# Altium PCB BMS_slave.PcbDoc (part 2 of 5)
Units mm, origin at the board's own origin, x right, y up, seen from the top; angles counter-clockwise.
Board outline 124.71 x 100.58 mm, 4 copper layers (Layer 1 - Top Layer, Layer 2 - GND, Layer 3 - Signal, Layer 4 - Bottom Layer), stack 1.56 mm thick; 370 components, 202 nets, 969 pads, 371 vias.
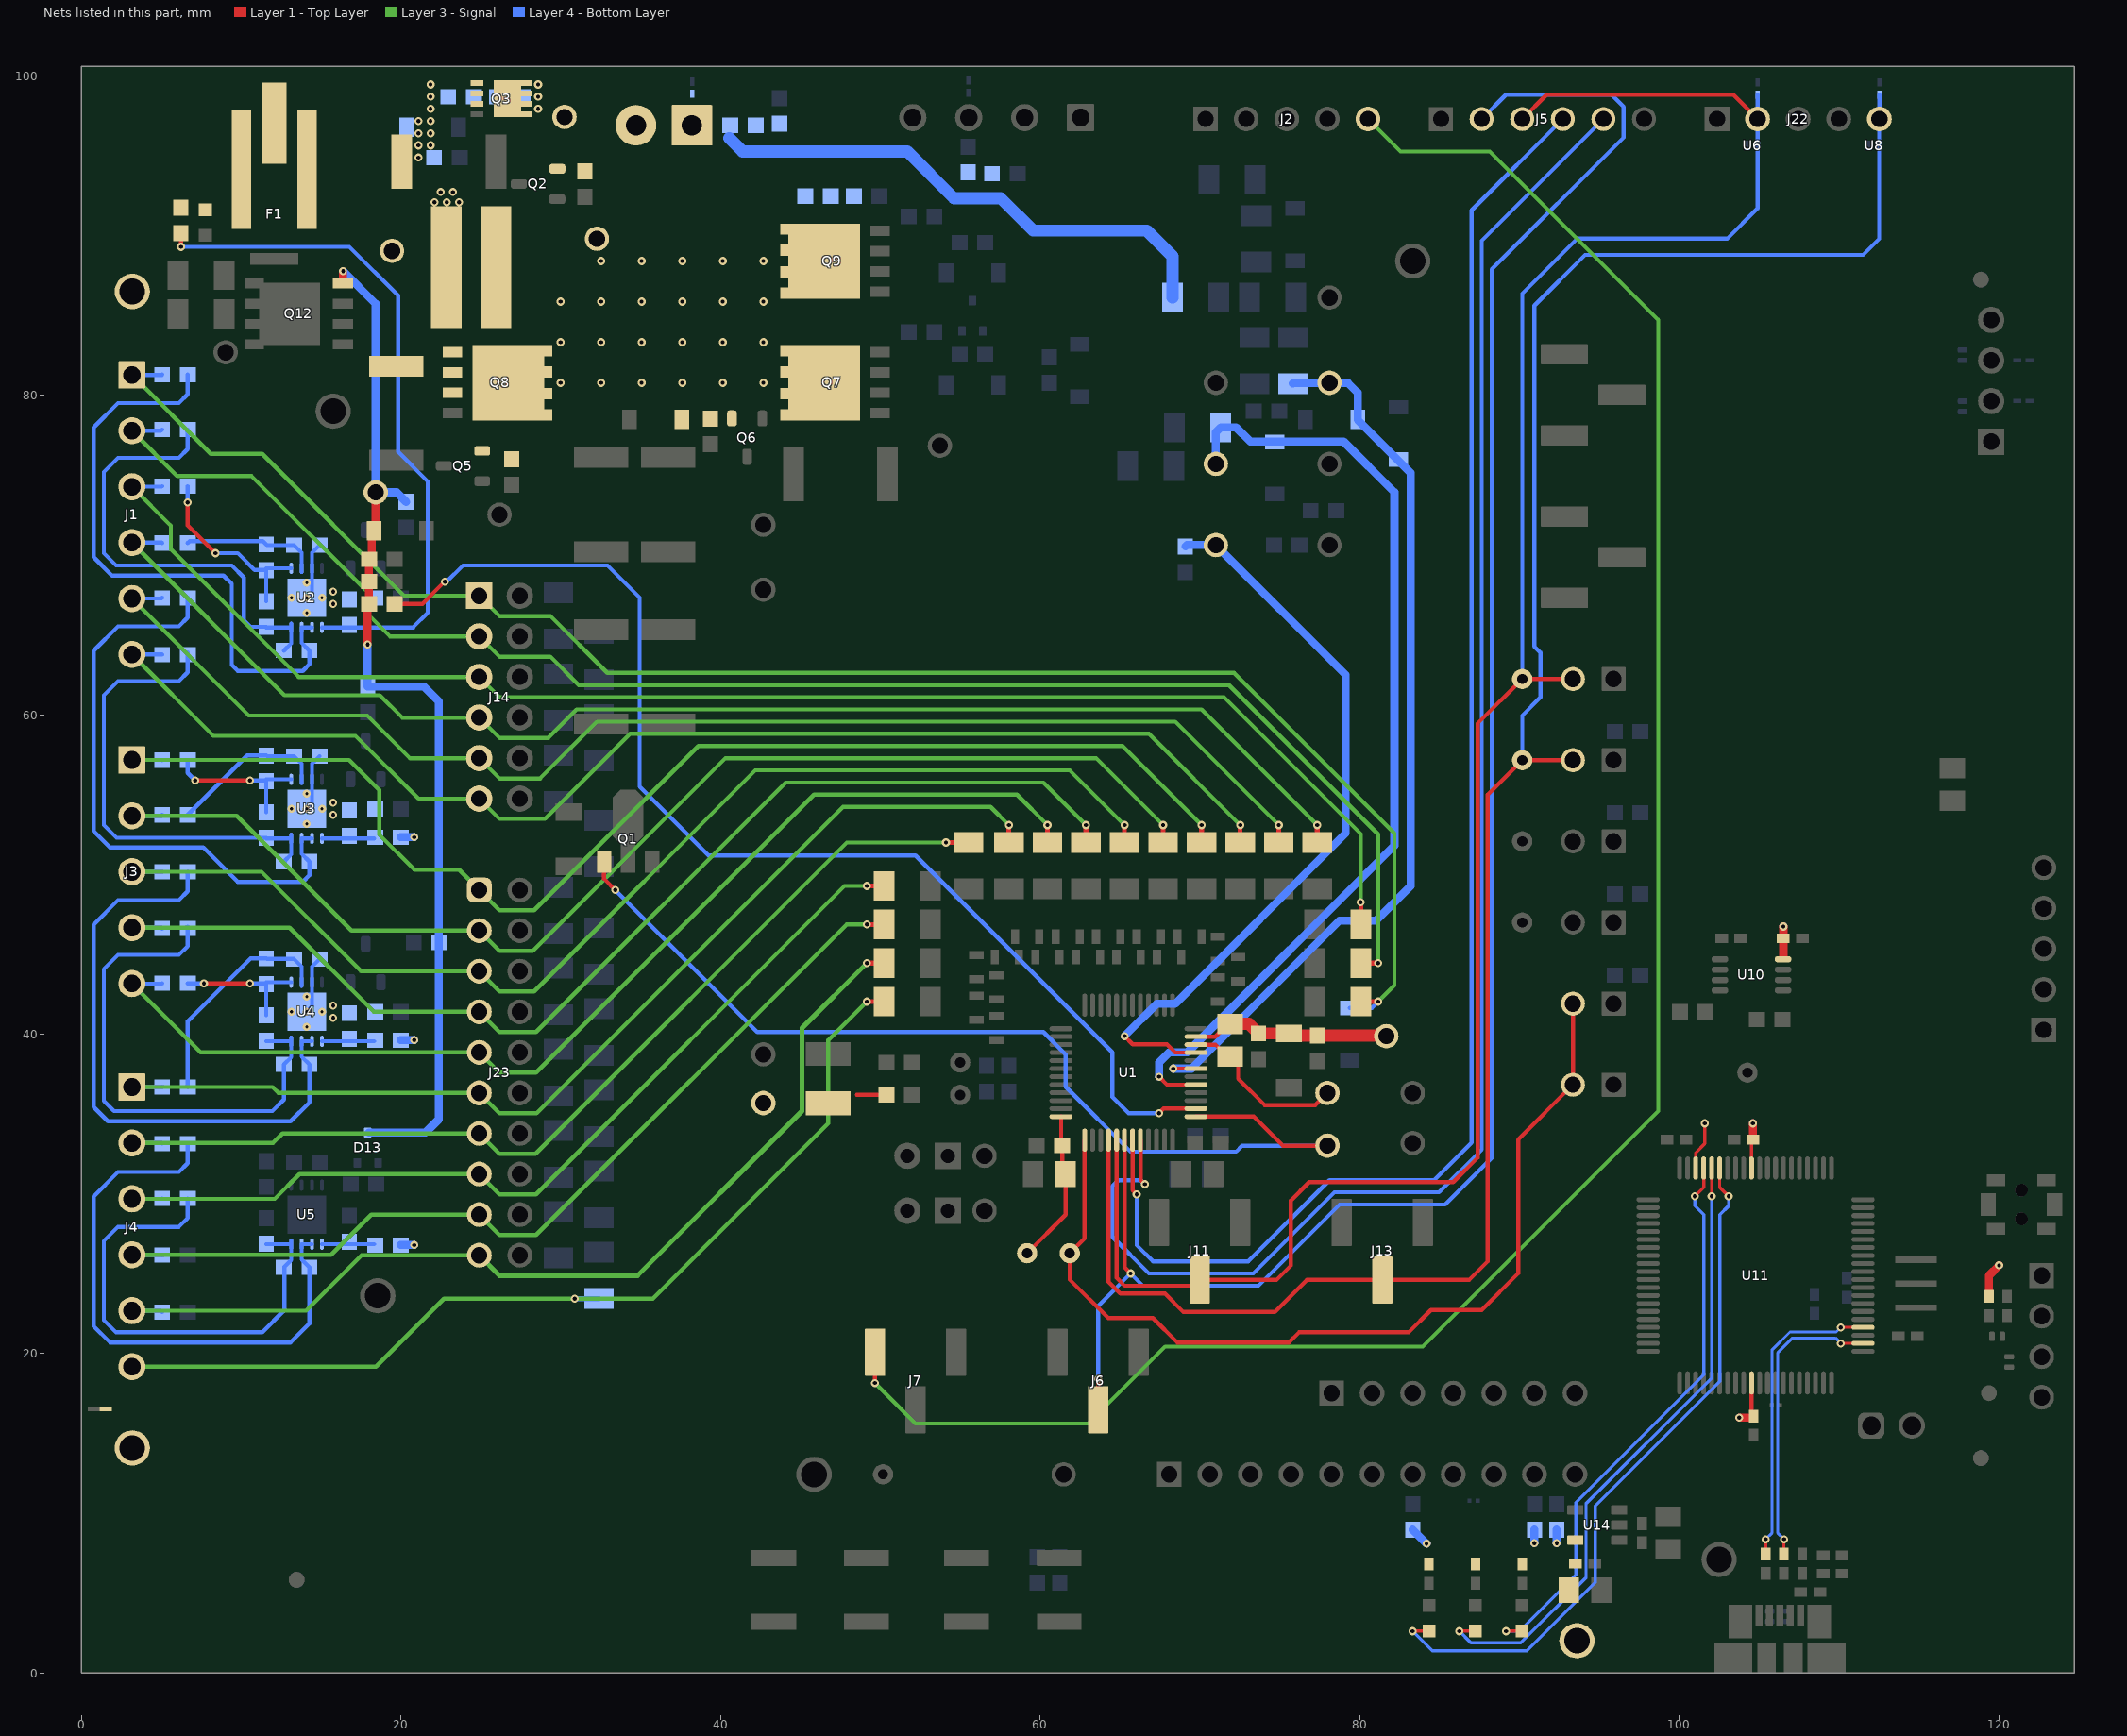
[diagram p4: the nets of this part, all layers, seen from the top]

## Part data
C1 C71: library part CMP-0008710-2, "CAP, CERM, 1 uF, 100 V, +/- 10%, X7R, 1206", Cap_Case=1206_180, Manufacturer=TDK, Supplier Part Number 1=445-4467-1-ND, TempCo=X7R, Tolerance_%=10%, Value1="0.004575 ohm", Value2=100V, ValueDisplayed=1uF, AEC Category=Q200, AEC Grade=N/A, AEC Qualified=N, Cap_F=1µF, ComponentLink1Description="Datasheet link", ComponentLink1URL=https://product.tdk.com/en/search/capacitor/ceramic/mlcc/info?part_no=C3216X7R2A105K160AA, CompType=Capacitor, ESR_ohm=4.575m, IRMS_A=3.39639A, LatestRevisionDate=2017-03-09, MountType=SMT, PackageReference=1206, PartNumber=C3216X7R2A105K160AA, Polarized=N, Published=2008-06-19, Publisher="Texas Instruments", RoHS=Y, SizeArea_mm2=5.12, SizeAreaWB_mm2=10.92, SizeX_mm=3.2, SizeY_mm=1.6, SizeZ_mm=1.8, Supplier 1=Digi-Key, Supplier 2=Mouser, Supplier Part Number 2=810-C3216X7R2A105K160AA, TaMax_C=125°C, TaMin_C=-55°C, Technology=Ceramic, U/M=EA, VDC_V=100V
C2: library part CMP-0007130-4, "CAP, CERM, 100 pF, 100 V, +/- 5%, C0G/NP0, AEC-Q200 Grade 1, 0603", Cap_Case=0603, Manufacturer=MuRata, Supplier Part Number 1=490-4771-1-ND, TempCo=C0G/NP0, Tolerance_%=5%, Value1=Unknown, Value2=100V, ValueDisplayed=100pF, AEC Category=Q200, AEC Grade=1, AEC Qualified=Y, Cap_F=100pF, ComponentLink1Description="Datasheet link", ComponentLink1URL=http://psearch.murata.com/capacitor/product/GCM1885C2A101JA16%23.pdf, CompType=Capacitor, LatestRevisionDate=2017-03-09, MountType=SMT, PackageReference=0603, PartNumber=GCM1885C2A101JA16D, Polarized=N, Published=2008-06-19, Publisher="Texas Instruments", RoHS=Y, SizeArea_mm2=1.28, SizeAreaWB_mm2=4.68, SizeX_mm=1.6, SizeY_mm=0.8, SizeZ_mm=1, Supplier 1=Digi-Key, Supplier 2=Mouser, Supplier Part Number 2=81-GCM1885C2A101JA6D, TaMax_C=125°C, TaMin_C=-55°C, Technology=Ceramic, U/M=EA, VDC_V=100V
C3: library part CMP-0008010-2, "CAP, CERM, 0.47 uF, 25 V, +/- 10%, X7R, AEC-Q200 Grade 1, 0805", Cap_Case=0805, Manufacturer=MuRata, Supplier Part Number 1=490-8044-1-ND, TempCo=X7R, Tolerance_%=10%, Value1=Unknown, Value2=25V, ValueDisplayed=0.47uF, AEC Category=Q200, AEC Grade=1, AEC Qualified=Y, Cap_F=470nF, ComponentLink1Description="Datasheet link", ComponentLink1URL=http://psearch.murata.com/capacitor/product/GCM219R71E474KA55%23.pdf, CompType=Capacitor, LatestRevisionDate=2017-03-09, MountType=SMT, PackageReference=0805, PartNumber=GCM219R71E474KA55D, Polarized=N, Published=2008-06-19, Publisher="Texas Instruments", RoHS=Y, SizeArea_mm2=2.5, SizeAreaWB_mm2=6.75, SizeX_mm=2, SizeY_mm=1.25, SizeZ_mm=1.45, Supplier 1=Digi-Key, Supplier 2=Mouser, Supplier Part Number 2=81-GCM219R71E474KA5D, TaMax_C=125°C, TaMin_C=-55°C, Technology=Ceramic, U/M=EA, VDC_V=25V
C4 C5 C6 C7 C8 C9 C10 C11 C14 C16 C17 C18 C19 C21 C22 C23 C24: library part CMP-0007047-4, "CAP, CERM, 0.22 uF, 50 V, +/- 10%, X7R, 0603", Cap_Case=0603, Manufacturer=TDK, Supplier Part Number 1=445-7408-1-ND, TempCo=X7R, Tolerance_%=10%, Value1="0.021699 ohm", Value2=50V, ValueDisplayed=0.22uF, AEC Category=Q200, AEC Grade=N/A, AEC Qualified=N, Cap_F=220nF, ComponentLink1Description="Datasheet link", ComponentLink1URL=https://product.tdk.com/en/search/capacitor/ceramic/mlcc/info?part_no=C1608X7R1H224K080AB, CompType=Capacitor, ESR_ohm=0.021699, IRMS_A=1.12496A, LatestRevisionDate=2017-03-09, MountType=SMT, PackageReference=0603, PartNumber=C1608X7R1H224K080AB, Polarized=N, Published=2008-06-19, Publisher="Texas Instruments", RoHS=Y, SizeArea_mm2=1.28, SizeAreaWB_mm2=4.68, SizeX_mm=1.6, SizeY_mm=0.8, SizeZ_mm=1, Supplier 1=Digi-Key, Supplier 2=Newark, Supplier 3=Mouser, Supplier Part Number 2=04X3259, Supplier Part Number 3=810-C1608X7R1H224K, TaMax_C=125°C, TaMin_C=-55°C, Technology=Ceramic, U/M=EA, VDC_V=50V
C12 C15: library part CMP-0008000-2, "CAP, CERM, 1 uF, 16 V, +/- 10%, X7R, 0805", Cap_Case=0805, Manufacturer="Taiyo Yuden", Supplier Part Number 1=587-1283-1-ND, TempCo=X7R, Tolerance_%=10%, Value1=Unknown, Value2=16V, ValueDisplayed=1uF, AEC Category=Q200, AEC Qualified=?, Cap_F=1µF, ComponentLink1Description="Datasheet link", ComponentLink1URL=http://www.yuden.co.jp/ut/product/pdf/djmk_e.pdf, CompType=Capacitor, LatestRevisionDate=2017-03-09, MountType=SMT, PackageReference=0805, PartNumber=EMK212B7105KG-T, Polarized=N, Published=2008-06-19, Publisher="Texas Instruments", RoHS=Y, SizeArea_mm2=2.5, SizeAreaWB_mm2=6.75, SizeX_mm=2, SizeY_mm=1.25, SizeZ_mm=1.45, Supplier 1=Digi-Key, Supplier 2=Farnell, Supplier Part Number 2=1683653, TaMax_C=125°C, TaMin_C=-55°C, Technology=Ceramic, U/M=EA, VDC_V=16V
C13: library part CMP-0006900-4, "CAP, CERM, 0.022 uF, 16 V, +/- 10%, X7R, 0603", Cap_Case=0603, Manufacturer=Kemet, Supplier Part Number 1=399-1093-1-ND, TempCo=X7R, Tolerance_%=10%, Value1=Unknown, Value2=16V, ValueDisplayed=0.022uF, AEC Category=Q200, AEC Qualified=?, Cap_F=22nF, ComponentLink1Description="Datasheet link", ComponentLink1URL=http://www.kemet.com/kemet/web/homepage/kechome.nsf/vapubfiles/F3102_Y5V.pdf/$file/F3102_Y5V.pdf, CompType=Capacitor, LatestRevisionDate=2017-03-09, MountType=SMT, PackageReference=0603, PartNumber=C0603C223K4RACTU, Polarized=N, Published=2008-06-19, Publisher="Texas Instruments", RoHS=Y, SizeArea_mm2=1.28, SizeAreaWB_mm2=4.68, SizeX_mm=1.6, SizeY_mm=0.8, SizeZ_mm=1, Supplier 1=Digi-Key, Supplier 2=Mouser, Supplier 3=Farnell, Supplier Part Number 2=80-C0603C223K4R, Supplier Part Number 3=1204523, TaMax_C=125°C, TaMin_C=-55°C, Technology=Ceramic, U/M=EA, VDC_V=16V
C20 C26: library part CMP-0006828-4, "CAP, CERM, 0.01 uF, 16 V, +/- 10%, X7R, 0603", Cap_Case=0603, Manufacturer="Wurth Elektronik", Supplier Part Number 1=732-7959-1-ND, TempCo=X7R, Tolerance_%=10%, Value1=Unknown, Value2=16V, ValueDisplayed=0.01uF, AEC Category=Q200, AEC Grade=N/A, AEC Qualified=N, Cap_F=10nF, ComponentLink1Description="Datasheet link", ComponentLink1URL=http://katalog.we-online.de/pbs/datasheet/885012206040.pdf, CompType=Capacitor, LatestRevisionDate=2017-03-09, MountType=SMT, PackageReference=0603, PartNumber=885012206040, Polarized=N, Published=2008-06-19, Publisher="Texas Instruments", RoHS=Y, SizeArea_mm2=1.28, SizeAreaWB_mm2=4.68, SizeX_mm=1.6, SizeY_mm=0.8, SizeZ_mm=1, Supplier 1=Digi-Key, Supplier 2=Mouser, Supplier Part Number 2=710-885012206040, TaMax_C=125°C, TaMin_C=-55°C, Technology=Ceramic, U/M=EA, VDC_V=16V
C25: library part CMP-0008001-2, "CAP, CERM, 2.2 uF, 16 V, +/- 10%, X7R, 0805", Cap_Case=0805, Manufacturer="Taiyo Yuden", Supplier Part Number 1=587-1431-1-ND, TempCo=X7R, Tolerance_%=10%, Value1=Unknown, Value2=16V, ValueDisplayed=2.2uF, AEC Category=Q200, AEC Qualified=?, Cap_F=2.2µF, ComponentLink1Description="Datasheet link", ComponentLink1URL=http://www.yuden.co.jp/ut/product/pdf/djmk_e.pdf, CompType=Capacitor, LatestRevisionDate=2017-03-09, MountType=SMT, PackageReference=0805, PartNumber=EMK212B7225KG-T, Polarized=N, Published=2008-06-19, Publisher="Texas Instruments", RoHS=Y, SizeArea_mm2=2.5, SizeAreaWB_mm2=6.75, SizeX_mm=2, SizeY_mm=1.25, SizeZ_mm=1.45, Supplier 1=Digi-Key, Supplier 2=Farnell, Supplier Part Number 2=1683654, TaMax_C=125°C, TaMin_C=-55°C, Technology=Ceramic, U/M=EA, VDC_V=16V
C27: library part CMP-0006841-4, "CAP, CERM, 100 pF, 50 V, +/- 5%, C0G/NP0, 0603", Cap_Case=0603, Manufacturer=Kemet, Supplier Part Number 1=399-1061-1-ND, TempCo=C0G/NP0, Tolerance_%=5%, Value1=Unknown, Value2=50V, ValueDisplayed=100pF, AEC Category=Q200, AEC Qualified=?, Cap_F=100pF, ComponentLink1Description="Datasheet link", ComponentLink1URL=http://www.kemet.com/kemet/web/homepage/kechome.nsf/vapubfiles/F3102_Y5V.pdf/$file/F3102_Y5V.pdf, CompType=Capacitor, LatestRevisionDate=2017-03-09, MountType=SMT, PackageReference=0603, PartNumber=C0603C101J5GACTU, Polarized=N, Published=2008-06-19, Publisher="Texas Instruments", RoHS=Y, SizeArea_mm2=1.28, SizeAreaWB_mm2=4.68, SizeX_mm=1.6, SizeY_mm=0.8, SizeZ_mm=1, Supplier 1=Digi-Key, Supplier 2=Mouser, Supplier 3=Farnell, Supplier Part Number 2=80-C0603C101J5G, Supplier Part Number 3=1414603, TaMax_C=125°C, TaMin_C=-55°C, Technology=Ceramic, U/M=EA, VDC_V=50V
C28 C31 C32 C33 C35 C39 C40 C41 C43 C44 C46 C47 C48 C49 C50 C51 C52 C53 C54 C55 C56 C57: library part CMP-0006837-4, "CAP, CERM, 0.1 uF, 50 V, +/- 10%, X7R, 0603", Cap_Case=0603, Manufacturer="Wurth Elektronik", TempCo=X7R, Tolerance_%=10%, Value1=Unknown, Value2=50V, ValueDisplayed=0.1uF, AEC Category=Q200, AEC Grade=N/A, AEC Qualified=N, Cap_F=100nF, ComponentLink1Description="Datasheet link", ComponentLink1URL=http://katalog.we-online.de/pbs/datasheet/885012206095.pdf, CompType=Capacitor, LatestRevisionDate=2017-03-09, MountType=SMT, PackageReference=0603, PartNumber=885012206095, Polarized=N, Published=2008-06-19, Publisher="Texas Instruments", RoHS=Y, SizeArea_mm2=1.28, SizeAreaWB_mm2=4.68, SizeX_mm=1.6, SizeY_mm=0.8, SizeZ_mm=1, TaMax_C=125°C, TaMin_C=-55°C, Technology=Ceramic, U/M=EA
  C31 C32 C33 C35 C39 C40 C41 C43 C44 C46 C47 C48 C49 C50 C51 C52 C53 C54 C55 C56 C57: VDC_V=50V
C29 C30 C34 C36 C37 C38 C42 C45: library part CMP-0064935-4, "CAP, CERM, 0.1 uF, 100 V,+/- 10%, X7R, AEC-Q200 Grade 1, 0603", Cap_Case=0603, Manufacturer=MuRata, Supplier Part Number 1=490-13420-1-ND, TempCo=X7R, Tolerance_%=10%, Value1=Unknown, Value2=100V, ValueDisplayed=0.1uF, AEC Category=Q200, AEC Grade=1, AEC Qualified=Y, Cap_F=100nF, ComponentLink1Description="Datasheet link", ComponentLink1URL=http://search.murata.co.jp/Ceramy/image/img/A01X/G101/ENG/GCJ188R72A104KA01-01.pdf, CompType=Capacitor, LatestRevisionDate=2017-06-05, MountType=SMT, PackageReference=0603, PartNumber=GCJ188R72A104KA01D, Polarized=N, Published=2008-06-19, Publisher="Texas Instruments", RoHS=Y, SizeArea_mm2=1.28, SizeAreaWB_mm2=4.68, SizeX_mm=1.6, SizeY_mm=0.8, SizeZ_mm=1, Supplier 1=Digi-Key, Supplier 2=Mouser, Supplier Part Number 2=81-GCJ188R72A104KA1D, TaMax_C=125°C, TaMin_C=-55°C, Technology=Ceramic, U/M=EA, VDC_V=100V
C58 C59 C60 C62 C65 C66 C68: library part CMP-0006228-2, "CAP, CERM, 0.1 uF, 16 V, +/- 10%, X7R, 0402", Cap_Case=0402, Manufacturer="Wurth Elektronik", Supplier Part Number 1=732-7532-1-ND, TempCo=X7R, Tolerance_%=10%, Value1=Unknown, Value2=16V, ValueDisplayed=0.1uF, AEC Category=Q200, AEC Grade=N/A, AEC Qualified=N, Cap_F=100nF, ComponentLink1Description="Datasheet link", ComponentLink1URL=http://katalog.we-online.de/pbs/datasheet/885012205037.pdf, CompType=Capacitor, LatestRevisionDate=2017-03-09, MountType=SMT, PackageReference=0402, PartNumber=885012205037, Polarized=N, Published=2008-06-19, Publisher="Texas Instruments", RoHS=Y, SizeArea_mm2=0.5, SizeAreaWB_mm2=3, SizeX_mm=1, SizeY_mm=0.5, SizeZ_mm=0.6, Supplier 1=Digi-Key, Supplier 2=Mouser, Supplier Part Number 2=710-885012205037, TaMax_C=125°C, TaMin_C=-55°C, Technology=Ceramic, U/M=EA, VDC_V=16V
C61 C67 C69: library part CMP-0006199-2, "CAP, CERM, 0.47 uF, 6.3 V, +/- 10%, X5R, 0402", Cap_Case=0402, Manufacturer=AVX, PartNumber=04026D474KAT2A, Supplier Part Number 1=478-6196-1-ND, TempCo=X5R, Tolerance_%=10%, Value1=Unknown, Value2=6.3V, ValueDisplayed=0.47uF, AEC Category=Q200, AEC Grade=N/A, AEC Qualified=N, Cap_F=470nF, ComponentLink1Description="Datasheet link", ComponentLink1URL=http://catalogs.avx.com/SurfaceMount.pdf, CompType=Capacitor, Green_EU RoHS=Passed, Green_EU RoHS-2=Incomplete, Green_Lifecycle=Active, Green_REACh=Passed, LatestRevisionDate=2017-03-09, MountType=SMT, PackageReference=0402, Polarized=N, Published=2008-06-19, Publisher="Texas Instruments", RoHS=Y, SizeArea_mm2=0.5, SizeAreaWB_mm2=3, SizeX_mm=1, SizeY_mm=0.5, SizeZ_mm=0.6, Supplier 1=Digi-Key, Supplier 2=Newark, Supplier 3=Mouser, Supplier Part Number 2=60R6163, Supplier Part Number 3=581-04026D474KAT2A, SymbolVersion=2008-07-09, TaMax_C=85°C, TaMin_C=-55°C, Technology=Ceramic, U/M=EA, VDC_V=6.3V
C63 C64: library part CMP-0085538-1, "CAP, CERM, 10 µF, 16 V,+/- 10%, X5R, 0805", Cap_Case=0805, Manufacturer="Samsung Electro-Mechanics", TempCo=X5R, Tolerance_%=10%, Value2=16V, ValueDisplayed=10µF, AEC Category=Q200, AEC Grade=N/A, AEC Qualified=N, Cap_F=10µF, ComponentLink1Description="Datasheet link", ComponentLink1URL=http://www.samsungsem.com/kr/support/product-search/mlcc/__icsFiles/afieldfile/2018/06/20/CL21A106KOQNNNG.pdf, CompType=Capacitor, MountType=SMT, PackageReference=0805, PartNumber=CL21A106KOQNNNG, Polarized=N, RoHS=Y, SizeArea_mm2=2.5, SizeAreaWB_mm2=6.75, SizeX_mm=2, SizeY_mm=1.25, SizeZ_mm=1.45, TaMax_C=85°C, TaMin_C=-55°C, Technology=Ceramic, U/M=EA, VDC_V=16V
C70: library part CMP-0006224-2, "CAP, CERM, 2200 pF, 10 V, +/- 10%, X7R, 0402", Cap_Case=0402, Manufacturer="Wurth Elektronik", Supplier Part Number 1=732-7503-1-ND, TempCo=X7R, Tolerance_%=10%, Value1=Unknown, Value2=10V, ValueDisplayed=2200pF, AEC Category=Q200, AEC Grade=N/A, AEC Qualified=N, Cap_F=2.2nF, ComponentLink1Description="Datasheet link", ComponentLink1URL=http://katalog.we-online.de/pbs/datasheet/885012205008.pdf, CompType=Capacitor, LatestRevisionDate=2017-03-09, MountType=SMT, PackageReference=0402, PartNumber=885012205008, Polarized=N, Published=2008-06-19, Publisher="Texas Instruments", RoHS=Y, SizeArea_mm2=0.5, SizeAreaWB_mm2=3, SizeX_mm=1, SizeY_mm=0.5, SizeZ_mm=0.6, Supplier 1=Digi-Key, Supplier 2=Mouser, Supplier Part Number 2=710-885012205008, TaMax_C=125°C, TaMin_C=-55°C, Technology=Ceramic, U/M=EA, VDC_V=10V
D1 D2 D9 D10 D11 D12: library part CMP-0028450-2, "Diode, Schottky, 100 V, 0.15 A, SOD-123", Manufacturer="Diodes Inc.", Value1=0.15A, Value2=0.6V, AEC Category=Q101, AEC Qualified=?, ComponentLink1Description="Datasheet link", ComponentLink1URL=http://www.diodes.com/datasheets/ds30044.pdf, CompType=Diode, Green_EU RoHS=Passed, Green_EU RoHS-2=Passed, Green_Lifecycle=Active, Green_REACh=Passed, Io_A=150mA, MountType=SMT, PackageReference=SOD-123, PartNumber=BAT46W-7-F, RoHS=Y, SizeArea_mm2=6.545, SizeAreaWB_mm2=13.095, SizeX_mm=3.85, SizeY_mm=1.7, SizeZ_mm=1.35, Type=Schottky, Vf_V=600mV, Vr_V=100V
D3: library part CMP-0002947-3, "LED, Red, SMD", Color=Red, Manufacturer="Wurth Elektronik", Power_TotalModule=72mW, Value1=0.072W, Value2=2V, Angle=140, ComponentLink1Description="Datasheet link", ComponentLink1URL=http://katalog.we-online.de/led/datasheet/150060RS75000.pdf, CompType=LED, Io_A=30mA, MountType=SMT, PackageReference=LED_0603, PartNumber=150060RS75000, RoHS=Y, Tjmax_C=85°C, Type=AlInGaP, Vf_V=2V, Vr_V=5V
D4 D5 D6: library part CMP-0005754-4, "Diode, Zener, 16 V, 500 mW, SOD-123", Manufacturer="Diodes Inc.", Power_W=500mW, Value1=0.5W, AEC Category=Q101, AEC Qualified=?, ComponentLink1Description="Datasheet link", ComponentLink1URL=http://www.diodes.com/datasheets/ds18010.pdf, CompType=Zener, MountType=SMT, PackageReference=SOD-123, PartNumber=MMSZ5246B-7-F, RJA_CperW=350, RoHS=Y, SizeArea_mm2=6.545, SizeAreaWB_mm2=13.095, SizeX_mm=3.85, SizeY_mm=1.7, SizeZ_mm=1.35, Vz_V=16V
D7: library part CMP-0029001-2, "Diode, Ultrafast, 100 V, 0.15 A, SOD-123", Manufacturer="Diodes Inc.", Value1=0.15A, Value2=1.25V, AEC Category=Q101, AEC Qualified=?, ComponentLink1Description="Datasheet link", ComponentLink1URL=http://www.diodes.com/datasheets/ds30086.pdf, CompType=Diode, Green_EU RoHS=Passed, Green_EU RoHS-2=Passed, Green_Lifecycle=Active, Green_REACh=Passed, Io_A=1.5dA, MountType=SMT, PackageReference=SOD-123, PartNumber=1N4148W-7-F, RoHS=Y, SizeArea_mm2=6.545, SizeAreaWB_mm2=13.095, SizeX_mm=3.85, SizeY_mm=1.7, SizeZ_mm=1.35, Tjmax_C=150°C, Type=Ultrafast, Vf_V=1.25V, Vr_V=100V
D8: library part CMP-0005740-3, "Diode, Zener, 10 V, 500 mW, SOD-123", Manufacturer="ON Semiconductor", Power_W=500mW, Value1=0.5W, AEC Category=Q101, AEC Qualified=?, ComponentLink1Description="Datasheet link", ComponentLink1URL=http://www.onsemi.com/pub_link/Collateral/MMSZ4678T1-D.PDF, CompType=Zener, MountType=SMT, PackageReference=SOD-123, PartNumber=MMSZ4697T1G, RJA_CperW=340, RoHS=Y, SizeArea_mm2=6.545, SizeAreaWB_mm2=13.095, SizeX_mm=3.85, SizeY_mm=1.7, SizeZ_mm=1.35, Vz_V=10V
D13: library part CMP-0028438-2, "Diode, Schottky, 40 V, 0.2 A, SOT-323", Manufacturer="Diodes Inc.", Value1=0.2A, Value2=0.9V, AEC Category=Q101, AEC Qualified=?, ComponentLink1Description="Datasheet link", ComponentLink1URL=http://www.diodes.com/datasheets/ds30114.pdf, CompType=Diode, Green_EU RoHS=Incomplete, Green_EU RoHS-2=Incomplete, Green_Lifecycle="Not Set", Green_REACh=Incomplete, Io_A=2dA, MountType=SMT, PackageReference=SOT-323, PartNumber=BAS40W-7-F, RoHS=Y, SizeArea_mm2=4.84, SizeAreaWB_mm2=10.24, SizeX_mm=2.2, SizeY_mm=2.2, SizeZ_mm=1.1, Type=Schottky, Vf_V=9dV, Vr_V=40V
D14 D15 D16: library part CMP-0002894-2, "LED, Green, SMD", Color=green, Manufacturer="Wurth Elektronik", Value1=W, Value2=2V, ComponentLink1Description="Datasheet link", ComponentLink1URL=http://katalog.we-online.de/led/datasheet/150060VS75000.pdf, CompType=LED, Io_A=20mA, MountType=SMT, PackageReference=LED_0603, PartNumber=150060VS75000, RoHS=Y, Type=AlInGaP, Vf_V=2V
E1 E2 E3 E4 E5 E6: library part CMP-0079939-1, CompType="Spark Gap"
F1: library part CMP-0078325-2, "Fuse, 30 A, 62 VDC, SMD", Irating_A=30A, Manufacturer="Dexerials Corporation", ComponentLink1Description="Datasheet URL", ComponentLink1URL=https://sps16.itg.ti.com/sites/KMS/crossdivteams/altium/docs/ComponentDatasheets/Dexerials_SFK-xx30x.pdf, CompType=Fuse, MountType=SMT, PackageReference=9.5x2x5mm, PartNumber=SFK-3030, RoHS=Y, Rtyp_Ohm=1.75m, VDC_V=62V
FID1 FID2 FID3 FID4 FID5 FID6: library part CMP-0077181-1, "Fiducial mark.  There is nothing to buy or mount.", Manufacturer=N/A, ClassName=FiducialMark, CompType=Fiducial, MountType=N/A, PackageReference=N/A, PartNumber=N/A
H1 H2 H3 H4: library part CMP-0003620-1, "Bumpon, Hemisphere, 0.44 X 0.20, Clear", Manufacturer=3M, Supplier Part Number 1=SJ5303-7-ND, ComponentLink1Description="Datasheet Link", ComponentLink1URL=http://multimedia.mmm.com/mws/mediawebserver.dyn?6666660Zjcf6lVs6EVs666cIsCOrrrrQ-, CompType=Bumpon, Key="SJ-5303 (CLEAR)", LatestRevisionDate=2017-03-09, MountType=N/A, PackageReference="Transparent Bumpon", PartNumber="SJ-5303 (CLEAR)", Publisher="Texas Instruments", RoHS=Y, Supplier 1=Digi-Key, Supplier 2=Newark, Supplier 3=Mouser, Supplier Part Number 2=23M7326, Supplier Part Number 3=517-SJ-5303CL
J1 J4: library part CMP-0087050-1, "TERM BLOCK 3.5MM VERT 6POS PCB", Current_A=10A, Manufacturer="On Shore Technology", Voltage_V=300V, ComponentLink1Description=Datasheet, ComponentLink1URL=http://www.on-shore.com/wp-content/uploads/2019/02/OSTTEXX0161.pdf, ContactFinish=Tin, PackageReference=HDR6, PartNumber=OSTTE060161, PinCount=6, RoHS=TRUE, Row_Count=1, Symbol Name=SYM-OSTTE060161
J2 J22 J28: library part CMP-0054597-1, "Header, 2.54mm, 5x1, Tin, TH", Color=Black, Current_A=3A, Manufacturer="Sullins Connector Solutions", Supplier Part Number 1=S1012E-05-ND, Voltage_V=1.8kV, Cert_UL=Y, ClassName=Header, CNHeader=TRUE, ComponentLink1Description="Datasheet URL", ComponentLink1URL=http://www.sullinscorp.com/catalogs/77_PAGE108-109_.100_MALE_HDR.pdf, CompType=Header, ContactFinish=Tin, CT=FALSE, Gender=Male, Green_EU RoHS=Incomplete, Green_EU RoHS-2=Incomplete, Green_Lifecycle="Not Set", Green_REACh=Incomplete, LatestRevisionDate=26/05/2017, MountType=TH, Orientation=Vertical, PackageReference="Header, 2.54mm, 5x1, TH", PartNumber=PEC05SAAN, PinCount=5, Pitch_mm=2.54, Publisher="Texas Instruments", RoHS=Y, Row_Count=1, Shrouded=N, Supplier 1=Digi-Key
J3: library part CMP-0087049-1, "TERM BLOCK 3.5MM VERT 5POS PCB", Current_A=10A, Manufacturer="On Shore Technology", Voltage_V=300V, ComponentLink1Description=Datasheet, ComponentLink1URL=http://www.on-shore.com/wp-content/uploads/2019/02/OSTTEXX0161.pdf, ContactFinish=Tin, PackageReference=HDR5, PartNumber=OSTTE050161, PinCount=5, RoHS=TRUE, Row_Count=1, Symbol Name=SYM-OSTTE050161
J5: library part CMP-0054567-1, "Header, 100mil, 6x1, Tin, TH", Manufacturer="Sullins Connector Solutions", Supplier Part Number 1=S1012E-06-ND, ClassName=Header, CNHeader=TRUE, ComponentLink1Description="Datasheet URL", ComponentLink1URL=http://www.sullinscorp.com/drawings/77_G_(P,_A,_R)_C___S___N,_STRAIGHT,_C10436.pdf, CompType=Header, CT=FALSE, Green_EU RoHS=Incomplete, Green_EU RoHS-2=Incomplete, Green_Lifecycle="Not Set", Green_REACh=Incomplete, LatestRevisionDate=26/05/2017, MountType=TH, PackageReference="TH, 6-Leads, Body 608x100mil, Pitch 100mil", PartNumber=PEC06SAAN, Publisher="Texas Instruments", RoHS=Y, Supplier 1=Digi-Key
J6 J7 J11 J13 J16 J19: library part CMP-0075388-1, "Header, 2.54mm, 3x1, Gold, SMT", Color=Black, Current_A=3A, Manufacturer=Molex, Supplier Part Number 1=0878980304-ND, Voltage_V=250V, Cert_CSA=Y, Cert_UL=Y, ClassName=Header, CNHeader=True, ComponentLink1Description="Datasheet URL", ComponentLink1URL=http://www.molex.com/pdm_docs/sd/878980204_sd.pdf, CompType=Header, ContactFinish=Gold, CT=False, Gender=Male, LatestRevisionDate=2017-07-14, MountType=SMT, Orientation=Vertical, PackageReference="Header, 2.54mm, 3x1, SMT", PartNumber=87898-0304, PinCount=3, Pitch_mm=2.54, Publisher="Texas Instruments", RoHS=Y, Row_Count=1, Shrouded=N, Supplier 1=Digi-Key, Supplier 2=Newark, Supplier 3=Mouser, Supplier Part Number 2=39T3063, Supplier Part Number 3=538-87898-0304
J8: library part CMP-0074913-1, "Terminal Block, 3.5mm Pitch, 2x1, TH", Color=Grey, Current_A=6A, Manufacturer="On-Shore Technology", Supplier Part Number 1=ED1514-ND, Voltage_V=150V, Cert_CULUS=Y, Cert_VDE=Y, CNHeader=False, ComponentLink1Description="Datasheet URL", ComponentLink1URL=http://on-shore.com/sites/default/files/manuals/ed555ds.pdf, CompType="Terminal Block", ContactFinish=Brass, CT=True, Gender=Female, Green_EU RoHS="Passed with Exemption", Green_EU RoHS-2=Passed, Green_Lifecycle=Active, Green_REACh=Passed, LatestRevisionDate=2017-07-12, MountType=TH, PackageReference=7.0x8.2x6.5mm, PartNumber=ED555/2DS, PinCount=2, Pitch_mm=3.5, Publisher="Texas Instruments", RoHS=Y, Row_Count=1, Shrouded=N, Supplier 1=Digi-Key
J9: library part CMP-0087048-1, "TERM BLOCK 3.5MM VERT 4POS PCB", Current_A=10A, Manufacturer="On Shore Technology", Voltage_V=300V, ComponentLink1Description=Datasheet, ComponentLink1URL=http://www.on-shore.com/wp-content/uploads/2019/02/OSTTEXX0161.pdf, ContactFinish=Tin, PackageReference=HDR4, PartNumber=OSTTE040161, PinCount=4, RoHS=TRUE, Row_Count=1, Symbol Name=SYM-OSTTE040161
J10 J12 J15 J18 J20 J21: library part CMP-0002337-1, "Header, 100mil, 2x1, Tin, TH", Color=Black, Current_A=3A, Manufacturer="Sullins Connector Solutions", Supplier Part Number 1=S1012E-02-ND, Voltage_V=1.8kV, Cert_UL=Y, ClassName=Header, CNHeader=TRUE, ComponentLink1Description="Datasheet URL", ComponentLink1URL=http://www.sullinscorp.com/catalogs/77_PAGE108-109_.100_MALE_HDR.pdf, CompType=Header, ContactFinish=Tin, CT=FALSE, Gender=Male, Green_EU RoHS=Incomplete, Green_EU RoHS-2=Incomplete, Green_Lifecycle="Not Set", Green_REACh=Incomplete, LatestRevisionDate=26/05/2017, MountType=TH, Orientation=Vertical, PackageReference="Header, 2 PIN, 100mil, Tin", PartNumber=PEC02SAAN, PinCount=2, Pitch_mm=2.54, Publisher="Texas Instruments", RoHS=Y, Row_Count=1, Shrouded=N, Supplier 1=Digi-Key
J14: library part CMP-0054551-2, "Header, 100mil, 6x2, Tin, TH", Color=Black, Current_A=3A, Manufacturer="Sullins Connector Solutions", Supplier Part Number 1=S2012E-06-ND, Voltage_V=1.8kV, Cert_UL=Y, ClassName=Header, ComponentLink1Description="Datasheet URL", ComponentLink1URL=http://www.sullinscorp.com/catalogs/77_PAGE108-109_.100_MALE_HDR.pdf, CompType=Header, ContactFinish=Tin, Gender=Male, Green_EU RoHS=Incomplete, Green_EU RoHS-2=Incomplete, Green_Lifecycle="Not Set", Green_REACh=Incomplete, MountType=TH, Orientation=Vertical, PackageReference="Header, 6x2, 100mil, Tin", PartNumber=PEC06DAAN, PinCount=12, Pitch_mm=2.54, RoHS=Y, Row_Count=2, RowSpacing_mm=2.54, Shrouded=N, Supplier 1=Digi-Key
J17: library part CMP-0055187-1, "Header (friction lock), 100mil, 4x1, R/A, TH", Manufacturer=Molex, Supplier Part Number 1=WM4302-ND, CNHeader=FALSE, ComponentLink1Description="Datasheet URL", ComponentLink1URL=http://www.molex.com/pdm_docs/sd/022053041_sd.pdf, CompType=Header, CT=FALSE, Green_EU RoHS=Passed, Green_EU RoHS-2=Passed, Green_Lifecycle=Active, Green_REACh=Passed, LatestRevisionDate=26/05/2017, MountType=TH, PackageReference="4x1 R/A Header", PartNumber=22/05/3041, Publisher="Texas Instruments", RoHS=Y, Supplier 1=Digi-Key, Supplier 2=Newark, Supplier 3=Mouser, Supplier Part Number 2=27C1932, Supplier Part Number 3=538-22-05-3041
J23: library part CMP-0054623-2, "Header, 2.54mm, 10x2, Tin, TH", Color=Black, Current_A=3A, Manufacturer="Sullins Connector Solutions", Supplier Part Number 1=S2012E-10-ND, Cert_UL=Y, ClassName=Header, ComponentLink1Description="Datasheet URL", ComponentLink1URL=https://drawings-pdf.s3.amazonaws.com/C10419.pdf, CompType=Header, ContactFinish=Tin, Gender=Male, Green_EU RoHS=Incomplete, Green_EU RoHS-2=Incomplete, Green_Lifecycle="Not Set", Green_REACh=Incomplete, MountType=TH, Orientation=Vertical, PackageReference="Header, 10x2, 2.54mm, TH", PartNumber=PEC10DAAN, PinCount=20, Pitch_mm=2.54, RoHS=Y, Row_Count=2, RowSpacing_mm=2.54, Shrouded=N, Supplier 1=Digi-Key
J24: library part CMP-0054584-1, "Header, 2.54 mm, 7x1, Gold, TH", Color=Black, Current_A=3A, Manufacturer="Sullins Connector Solutions", Supplier Part Number 1=S1011E-07-ND, Voltage_V=1.8kV, Cert_UL=Y, ClassName=Header, CNHeader=TRUE, ComponentLink1Description="Datasheet URL", ComponentLink1URL=http://www.sullinscorp.com/catalogs/77_PAGE108-109_.100_MALE_HDR.pdf, CompType=Header, ContactFinish=Gold, CT=FALSE, Gender=Male, LatestRevisionDate=26/05/2017, MountType=TH, Orientation=Vertical, PackageReference="Header, 2.54 mm, 7x1, TH", PartNumber=PBC07SAAN, PinCount=7, Pitch_mm=2.54, Publisher="Texas Instruments", RoHS=Y, Row_Count=1, Shrouded=N, Supplier 1=Digi-Key
J25: library part CMP-0054585-1, "Header, 2.54 mm, 11x1, Gold, TH", Color=Black, Current_A=3A, Manufacturer="Sullins Connector Solutions", Supplier Part Number 1=S1011E-11-ND, Voltage_V=1.8kV, Cert_UL=Y, ClassName=Header, CNHeader=TRUE, ComponentLink1Description="Datasheet URL", ComponentLink1URL=http://www.sullinscorp.com/catalogs/77_PAGE108-109_.100_MALE_HDR.pdf, CompType=Header, ContactFinish=Gold, CT=FALSE, Gender=Male, LatestRevisionDate=26/05/2017, MountType=TH, Orientation=Vertical, PackageReference="Header, 2.54 mm, 11x1, TH", PartNumber=PBC11SAAN, PinCount=11, Pitch_mm=2.54, Publisher="Texas Instruments", RoHS=Y, Row_Count=1, Shrouded=N, Supplier 1=Digi-Key
J26: library part CMP-0055304-1, "Receptacle, Micro-USB Type B, 0.65 mm, 5x1, R/A, Bottom Mount SMT", Manufacturer=Molex, PartNumber=47346-1001, Supplier Part Number 1=06X9936, CNHeader=FALSE, ComponentLink1Description="Datasheet URL", ComponentLink1URL=http://www.molex.com/pdm_docs/sd/473461001_sd.pdf, CompType=USB, CT=TRUE, Gender=Female, LatestRevisionDate=26/05/2017, MountType=SMT, PackageReference="Receptacle, 0.65mm, 5x1, R/A, SMT", Publisher="Texas Instruments", RoHS=Y, Supplier 1=Newark, Supplier 2=Mouser, Supplier Part Number 2=538-47346-1001, SymbolCreator=a0411947, SymbolVersion=2013-06-26
J27: library part CMP-0054794-2, "Header, 2.54 mm, 2x1, Gold, TH", Color=Black, Manufacturer="Wurth Elektronik", Supplier Part Number 1=732-5315-ND, Cert_UL=Y, ClassName=Header, ComponentLink1Description="Datasheet URL", ComponentLink1URL=http://katalog.we-online.de/em/datasheet/6130xx11121.pdf, CompType=Header, ContactFinish=Gold, Gender=Male, Green_EU RoHS=Passed, Green_EU RoHS-2=Incomplete, Green_Lifecycle=Active, Green_REACh=Passed, MountType=TH, Orientation=Vertical, PackageReference="Header, 2.54mm, 2x1, TH", PartNumber=61300211121, PinCount=2, Pitch_mm=2.54, RoHS=Y, Row_Count=1, Shrouded=N, Supplier 1=Digi-Key, Supplier 2=Newark, Supplier 3=Mouser, Supplier Part Number 2=20X0948, Supplier Part Number 3=710-61300211121
J29: library part CMP-0055331-1, "Header, 2.54mm, 4x1, Tin, TH", Color=Black, Current_A=4A, Manufacturer=Molex, Supplier Part Number 1=WM50016-04-ND, Voltage_V=250V, Cert_UL=Y, ClassName=Header, CNHeader=TRUE, ComponentLink1Description="Datasheet URL", ComponentLink1URL=http://www.molex.com/pdm_docs/sd/022284043_sd.pdf, CompType=Header, ContactFinish=Tin, CT=FALSE, Gender=Male, LatestRevisionDate=26/05/2017, MountType=TH, Orientation=Vertical, PackageReference="Header, 2.54mm, 4x1, TH", PartNumber=22284043, PinCount=4, Pitch_mm=2.54, Publisher="Texas Instruments", RoHS=Y, Row_Count=1, Shrouded=N, Supplier 1=Digi-Key
LOGO4 LOGO5: library part CMP-0074835-1, "IEC 61010-1 High Voltage Warning", LatestRevisionDate=2017-07-06, Lib Reference=IEC_HighVoltage, PartNumber="DANGER HIGH VOLTAGE", Published=2009-03-03, Publisher="Texas Instruments", SymbolCreator=a0412235, SymbolVersion=2011-08-22
Logo8: library part CMP-0074847-1, "FCC_disclaimer", LatestRevisionDate=2017-07-06, Lib Reference=FCC_disclaimer, PartNumber="FCC disclaimer", Published=2009-03-03, Publisher="Texas Instruments"
Logo9: library part CMP-0074769-1, Lib Reference="WEEE logo", PartNumber="WEEE logo"
Logo10: library part CMP-0074836-1, "IEC 61010-1 Caution Warning", LatestRevisionDate=2017-07-06, Lib Reference=IEC_Caution, PartNumber="CAUTION.  READ USER GUIDE BEFORE USE", Published=2009-03-03, Publisher="Texas Instruments", SymbolCreator=a0412235, SymbolVersion=2011-08-22
NT1 NT2 NT3 NT4 NT5: library part CMP-0078142-3, "Single point connection between nets.", Manufacturer=N/A, CompType=Net-Tie, MountType=SMT, PackageReference=N/A, PartNumber=N/A
Q1: library part CMP-0000510-2, "Transistor, NPN, 150 V, 1 A, AEC-Q101, SOT-89", Manufacturer="Diodes Inc.", Supplier Part Number 1=FCX495CT-ND, Value1="1 A", Value2=300, AEC Category=Q101, AEC Qualified=Y, ComponentLink1Description="Datasheet link", ComponentLink1URL=https://www.diodes.com/assets/Datasheets/FCX495.pdf, CompType=BJT, HfeMax=300, IcRated_A=1A, LatestRevisionDate=2017-03-09, MountType=SMT, NPN=1, PackageReference=SOT-89, PartNumber=FCX495TA, PNP=0, Published=2008-07-31, Publisher="Texas Instruments", RoHS=Y, SizeArea_mm2=18.45, SizeAreaWB_mm2=28.05, SizeX_mm=4.1, SizeY_mm=4.5, SizeZ_mm=1.5, Supplier 1=Digi-Key, Supplier 2=Newark, Supplier 3=Mouser, Supplier Part Number 2=65T9121, Supplier Part Number 3=522-FCX495TA, TaMax_C=150°C, TaMin_C=-65°C, U/M=EA, Vceo_V=150V, Vcesat1_V=200mV
Q2 Q5 Q6: library part CMP-0000093-3, "MOSFET, P-CH, -150 V, -0.53 A, SOT-23", Alternate Manufacturer=None, Manufacturer=Vishay-Siliconix, Value2="7.7 nC", AEC Category=Q101, AEC Qualified=N, ChMode=Enhancement, ChType=P, ComponentLink1Description="Datasheet link", ComponentLink1URL=http://www.vishay.com/doc?73238, CompType=MOSFET, IdsMax_A=-530mA, MountType=SMT, PackageReference=SOT-23, PartNumber=SI2325DS-T1-E3, QgTyp_nC=7.7, RoHS=Y, SizeArea_mm2=7.5, SizeAreaWB_mm2=14, SizeX_mm=2.5, SizeY_mm=3, SizeZ_mm=1.1, VdsMax_V=-150V, Vgs_V=-20V
Q3: library part CMP-0001051-2, "MOSFET, N-CH, 150 V, 13 A, PG-TSDSON-8", Alternate Manufacturer=None, Manufacturer="Infineon Technologies", Supplier Part Number 1="BSZ900N15NS3 GCT-ND", Value2="5 nC", AEC Category=Q101, AEC Qualified=?, ChType=N, ComponentLink1Description="Datasheet link", ComponentLink1URL=http://www.infineon.com/dgdl/BSZ900N15NS3+Rev2.1_.pdf?folderId=db3a304326623792012669f6bee2224b&fileId=db3a304326623792012669f7decc224c, CompType=MOSFET, IdsMax_A=13A, LatestRevisionDate=2017-03-09, LatestRevisionNote="Added parts.", MountType=SMT, PackageReference=PG-TSDSON-8, PartNumber="BSZ900N15NS3 G", Published=2008-06-19, Publisher="Texas Instruments", QgTyp_nC=5, RoHS=Y, SizeArea_mm2=11.56, SizeAreaWB_mm2=19.36, SizeX_mm=3.4, SizeY_mm=3.4, SizeZ_mm=1.1, Supplier 1=Digi-Key, Supplier 2=Mouser, Supplier Part Number 2=726-BSZ900N15NS3G, U/M=EA, VdsMax_V=150V, Vgs_V=20V
Q4 Q11 Q13: library part CMP-0000333-2, "Transistor, PNP, 150 V, 0.5 A, SOT-23", Manufacturer="ON Semiconductor", Supplier Part Number 1=MMBT5401LT1GOSCT-ND, Value1="0.5 A", Value2=240, AEC Category=Q101, AEC Qualified=?, ComponentLink1Description="Datasheet link", ComponentLink1URL=http://www.onsemi.com/pub_link/Collateral/MMBT5401LT1-D.PDF, CompType=BJT, HfeMax=240, IcRated_A=500mA, LatestRevisionDate=2017-03-09, MountType=SMT, NPN=0, PackageReference=SOT-23, PartNumber=MMBT5401LT1G, PNP=1, Published=2008-07-31, Publisher="Texas Instruments", RoHS=Y, SizeArea_mm2=7.5, SizeAreaWB_mm2=14, SizeX_mm=2.5, SizeY_mm=3, SizeZ_mm=1.1, Supplier 1=Digi-Key, Supplier 2=Newark, Supplier 3=Mouser, Supplier Part Number 2=88H4794, Supplier Part Number 3=863-MMBT5401LT1G, TaMax_C=150°C, TaMin_C=-55°C, U/M=EA, Vceo_V=150V, Vcesat1_V=500mV
Q7 Q8 Q9: library part CMP-0067566-1, "MOSFET, N-CH, 150 V, 56 A, PG-TDSON-8", Alternate Manufacturer=None, Manufacturer="Infineon Technologies", Supplier Part Number 1=BSC160N15NS5ATMA1-ND, Value1="? ohm", Value2="19 nC", AEC Category=Q101, AEC Qualified=N, ChType=N, ComponentLink1Description="Datasheet link", ComponentLink1URL=http://www.infineon.com/dgdl/Infineon-BSC160N15NS5-DS-v02_02-EN.pdf?fileId=5546d46253f650570154a055b7215b1b, CompType=MOSFET, IdsMax_A=56A, LatestRevisionDate=2017-06-05, LatestRevisionNote="Added parts.", MountType=SMT, PackageReference=PG-TDSON-8, PartNumber=BSC160N15NS5ATMA1, Published=2008-06-19, Publisher="Texas Instruments", QgTyp_nC=19.0, RoHS=Y, SizeArea_mm2=29.351, SizeAreaWB_mm2=55.131, SizeX_mm=5.99, SizeY_mm=4.9, SizeZ_mm=1.12, Supplier 1=Digi-Key, Supplier 2=Mouser, Supplier Part Number 2=726-BSC160N15NS5ATM, U/M=EA, VdsMax_V=150V, Vgs_V=20V
Q10: library part CMP-0000774-1, "MOSFET, N-CH, 60 V, 0.31 A, SOT-323", Alternate Manufacturer=None, Manufacturer="Fairchild Semiconductor", PartNumber=2N7002KW, Supplier Part Number 1=2N7002KWCT-ND, Value1=1, AEC Category=Q101, AEC Qualified=?, ChType=N, ComponentLink1Description="Datasheet link", ComponentLink1URL=http://www.fairchildsemi.com/ds/2N/2N7002KW.pdf, CompType=MOSFET, Green_EU RoHS=Passed, Green_EU RoHS-2=Passed, Green_Lifecycle=Active, Green_REACh=Passed, IdsMax_A=3.1dA, LatestRevisionDate=2017-03-09, LatestRevisionNote="Added parts.", MountType=SMT, PackageReference=SOT-323, Published=2008-06-19, Publisher="Texas Instruments", Rdson45_ohm=1.6, RoHS=Y, SizeArea_mm2=4.84, SizeAreaWB_mm2=10.24, SizeX_mm=2.2, SizeY_mm=2.2, SizeZ_mm=1.1, Supplier 1=Digi-Key, Supplier 2=Mouser, Supplier Part Number 2=512-2N7002KW, SymbolVersion=2008-07-28, U/M=EA, VdsMax_V=60V, Vgs_V=2.1V
Q12: library part CMP-0001069-3, "MOSFET, N-CH, 150 V, 3 A, PowerPAK SO-8", Alternate Manufacturer=None, Manufacturer=Vishay-Siliconix, Supplier Part Number 1=SI7898DP-T1-E3CT-ND, Value1=0.07, Value2="17 nC", AEC Category=Q101, AEC Qualified=?, ChType=N, ComponentLink1Description="Datasheet link", ComponentLink1URL=http://www.vishay.com/docs/71873/71873.pdf, CompType=MOSFET, IdsMax_A=3A, LatestRevisionDate=2017-03-09, LatestRevisionNote="Added parts.", MountType=SMT, PackageReference="PowerPAK SO-8", PartNumber=SI7898DP-E3, Published=2008-06-19, Publisher="Texas Instruments", QgTyp_nC=17, Rdson45_ohm=0.076, RoHS=Y, SizeArea_mm2=29.351, SizeAreaWB_mm2=55.131, SizeX_mm=5.99, SizeY_mm=4.9, SizeZ_mm=1.12, Supplier 1=Digi-Key, U/M=EA, VdsMax_V=150V, Vgs_V=20V
R1 R27 R28 R31 R41 R67 R81: library part CMP-0025700-4, "RES, 100, 5%, 0.1 W, AEC-Q200 Grade 0, 0603", Manufacturer=Vishay-Dale, PartNumber=CRCW0603100RJNEA, Power_W=100mW, Supplier Part Number 1=541-100GCT-ND, TempCo="200 ppm/C", Tolerance_%=5%, Value2=0.1W, Value_Code=100R, ValueDisplayed=100, AEC Category=Q200, AEC Grade=0, AEC Qualified=Y, ComponentLink1Description="Datasheet link", ComponentLink1URL=http://www.vishay.com/docs/20035/dcrcwe3.pdf, CompType=Resistor, EIA_Code=E24, LatestRevisionDate=2017-06-13, MountType=SMT, PackageReference=0603, Published=2008-06-26, Publisher="Texas Instruments", Res_ohm=100, RoHS=E, SizeArea_mm2=1.28, SizeX_mm=1.6, SizeY_mm=0.8, SizeZ_mm=1, Supplier 1=Digi-Key, Supplier 2=Newark, Supplier 3=Mouser, Supplier Part Number 2=59M6764, Supplier Part Number 3=71-CRCW0603J-100-E3, SymbolVersion=2009-05-29, Technology="Thick Film", U/M=EA, Value1=5%, VDC_V=75V
R2 R3 R4 R7 R8 R11 R12 R13 R14 R16 R17 R18 R19 R21 R22 R23 R24: library part CMP-0016781-3, "RES, 20.0, 1%, 0.25 W, AEC-Q200 Grade 0, 1206", Manufacturer=Vishay-Dale, Power_W=250mW, Supplier Part Number 1=541-20.0FCT-ND, TempCo="100 ppm/C", Tolerance_%=1%, Value2=0.25W, Value_Code=20R0, ValueDisplayed=20.0, AEC Category=Q200, AEC Grade=0, AEC Qualified=Y, ComponentLink1Description="Datasheet link", ComponentLink1URL=http://www.vishay.com/docs/20035/dcrcwe3.pdf, CompType=Resistor, EIA_Code=E96, MountType=SMT, PackageReference=1206, PartNumber=CRCW120620R0FKEA, Res_ohm=20, RoHS=E, SizeArea_mm2=5.12, SizeX_mm=3.2, SizeY_mm=1.6, SizeZ_mm=1.35, Supplier 1=Digi-Key, Supplier 2=Newark, Supplier 3=Mouser, Supplier Part Number 2=42K4894, Supplier Part Number 3=71-CRCW1206-20-E3, Technology="Thick Film", Value1=1%, VDC_V=200V
R5 R6 R9 R10: library part CMP-0015916-3, "RES, 220, 5%, 1 W, AEC-Q200 Grade 0, 2512", Manufacturer=Vishay-Dale, Power_W=1W, Supplier Part Number 1=541-220XCT-ND, TempCo="200 ppm/C", Tolerance_%=5%, Value_Code=220R, ValueDisplayed=220, AEC Category=Q200, AEC Grade=0, AEC Qualified=Y, ComponentLink1Description="Datasheet link", ComponentLink1URL=http://www.vishay.com/docs/20035/dcrcwe3.pdf, CompType=Resistor, EIA_Code=E24, MountType=SMT, PackageReference=2512, PartNumber=CRCW2512220RJNEG, Res_ohm=220, RoHS=E, SizeArea_mm2=20.16, SizeX_mm=6.3, SizeY_mm=3.2, SizeZ_mm=0.71, Supplier 1=Digi-Key, Technology="Thick Film", Value1=5%, Value2=1W, VDC_V=500V
R15 R56 R112 R113: library part CMP-0025697-4, "RES, 0, 5%, 0.1 W, AEC-Q200 Grade 0, 0603", Manufacturer=Vishay-Dale, Power_W=100mW, Supplier Part Number 1=541-0.0GCT-ND, TempCo="200 ppm/C", Tolerance_%=5%, Value2=0.1W, Value_Code=0000, ValueDisplayed=0, AEC Category=Q200, AEC Grade=0, AEC Qualified=Y, ComponentLink1Description="Datasheet link", ComponentLink1URL=http://www.vishay.com/docs/20035/dcrcwe3.pdf, CompType=Resistor, EIA_Code=E24, MountType=SMT, PackageReference=0603, PartNumber=CRCW06030000Z0EA, Res_ohm=0, RoHS=E, SizeArea_mm2=1.28, SizeX_mm=1.6, SizeY_mm=0.8, SizeZ_mm=1, Supplier 1=Digi-Key, Supplier 2=Newark, Supplier 3=Mouser, Supplier Part Number 2=52K8014, Supplier Part Number 3=71-CRCW0603-0-E3, Technology="Thick Film", Value1=5%, VDC_V=75V
R20 R25 R29 R89 R92 R94 R97 R99 R109 R110 R111: library part CMP-0025701-4, "RES, 10 k, 5%, 0.1 W, AEC-Q200 Grade 0, 0603", Manufacturer=Vishay-Dale, Power_W=100mW, Supplier Part Number 1=541-10KGCT-ND, TempCo="200 ppm/C", Tolerance_%=5%, Value2=0.1W, Value_Code=10k0, ValueDisplayed=10k, AEC Category=Q200, AEC Grade=0, AEC Qualified=Y, ComponentLink1Description="Datasheet link", ComponentLink1URL=http://www.vishay.com/docs/20035/dcrcwe3.pdf, CompType=Resistor, EIA_Code=E24, MountType=SMT, PackageReference=0603, PartNumber=CRCW060310K0JNEA, Res_ohm=10k, RoHS=E, SizeArea_mm2=1.28, SizeX_mm=1.6, SizeY_mm=0.8, SizeZ_mm=1, Supplier 1=Digi-Key, Supplier 2=Newark, Supplier 3=Mouser, Supplier Part Number 2=52K8066, Supplier Part Number 3=71-CRCW0603J-10K-E3, Technology="Thick Film", Value1=5%, VDC_V=75V
R26 R91: library part CMP-0025698-4, "RES, 100 k, 5%, 0.1 W, AEC-Q200 Grade 0, 0603", Manufacturer=Vishay-Dale, Power_W=100mW, Supplier Part Number 1=541-100KGCT-ND, TempCo="200 ppm/C", Tolerance_%=5%, Value2=0.1W, Value_Code=100k, AEC Category=Q200, AEC Grade=0, AEC Qualified=Y, ComponentLink1Description="Datasheet link", ComponentLink1URL=http://www.vishay.com/docs/20035/dcrcwe3.pdf, CompType=Resistor, EIA_Code=E24, MountType=SMT, PackageReference=0603, PartNumber=CRCW0603100KJNEA, Res_ohm=100k, RoHS=E, SizeArea_mm2=1.28, SizeX_mm=1.6, SizeY_mm=0.8, SizeZ_mm=1, Supplier 1=Digi-Key, Supplier 2=Newark, Supplier 3=Mouser, Supplier Part Number 2=59M6763, Supplier Part Number 3=71-CRCW0603J-100K-E3, Technology="Thick Film", Value1=5%, ValueDisplayed=100k, VDC_V=75V
R30: library part CMP-0015200-2, "RES, 0.001, 1%, 1 W, 1210", Manufacturer=Rohm, PartNumber=PMR25HZPFV1L00, Power_W=1W, Supplier Part Number 1=RHM.001APCT-ND, TempCo="100 ppm/C", Tolerance_%=1%, Value_Code=1L000, ValueDisplayed=0.001, AEC Category=Q200, AEC Qualified=?, ComponentLink1Description="Datasheet link", ComponentLink1URL=http://media.digikey.com/pdf/Data%20Sheets/Rohm%20PDFs/PMR25-Series.pdf, CompType=Resistor, EIA_Code=E96, Green_EU RoHS=Passed, Green_EU RoHS-2=Incomplete, Green_Lifecycle=Active, Green_REACh=Passed, LatestRevisionDate=2017-03-09, MountType=SMT, PackageReference=1210, Published=2008-06-26, Publisher="Texas Instruments", Res_ohm=1m, RoHS=Y, SizeArea_mm2=8, SizeAreaWB_mm2=14.7, SizeX_mm=3.2, SizeY_mm=2.5, SizeZ_mm=1.35, Supplier 1=Digi-Key, SymbolVersion=2009-05-29, Technology="Thick Film", U/M=EA, Value1=1%, Value2=1W
R32 R34 R36 R37 R47 R49 R53 R54 R69 R72 R75 R78 R83 R84 R85 R86: library part CMP-0025729-4, "RES, 1.0 k, 5%, 0.1 W, AEC-Q200 Grade 0, 0603", Manufacturer=Vishay-Dale, PartNumber=CRCW06031K00JNEA, Power_W=100mW, Supplier Part Number 1=541-1.0KGCT-ND, TempCo="200 ppm/C", Tolerance_%=5%, Value2=0.1W, Value_Code=1k00, ValueDisplayed=1.0k, AEC Category=Q200, AEC Grade=0, AEC Qualified=Y, ComponentLink1Description="Datasheet link", ComponentLink1URL=http://www.vishay.com/docs/20035/dcrcwe3.pdf, CompType=Resistor, EIA_Code=E24, LatestRevisionDate=2017-06-13, MountType=SMT, PackageReference=0603, Published=2008-06-26, Publisher="Texas Instruments", Res_ohm=1k, RoHS=E, SizeArea_mm2=1.28, SizeX_mm=1.6, SizeY_mm=0.8, SizeZ_mm=1, Supplier 1=Digi-Key, Supplier 2=Newark, Supplier 3=Mouser, Supplier Part Number 2=59M6750, Supplier Part Number 3=71-CRCW0603J-1.0K-E3, SymbolVersion=2009-05-29, Technology="Thick Film", U/M=EA, Value1=5%, VDC_V=75V
R33 R39 R40: library part CMP-0015972-3, "RES, 4.7 k, 5%, 1 W, AEC-Q200 Grade 0, 2512", Manufacturer=Vishay-Dale, Power_W=1W, Supplier Part Number 1=541-4.7KXCT-ND, TempCo="200 ppm/C", Tolerance_%=5%, Value_Code=4k70, ValueDisplayed=4.7k, AEC Category=Q200, AEC Grade=0, AEC Qualified=Y, ComponentLink1Description="Datasheet link", ComponentLink1URL=http://www.vishay.com/docs/20035/dcrcwe3.pdf, CompType=Resistor, EIA_Code=E24, MountType=SMT, PackageReference=2512, PartNumber=CRCW25124K70JNEG, Res_ohm=4.7k, RoHS=E, SizeArea_mm2=20.16, SizeX_mm=6.3, SizeY_mm=3.2, SizeZ_mm=0.71, Supplier 1=Digi-Key, Technology="Thick Film", Value1=5%, Value2=1W, VDC_V=500V
R35 R42 R43 R50 R51 R52: library part CMP-0025702-4, "RES, 10 M, 5%, 0.1 W, AEC-Q200 Grade 0, 0603", Manufacturer=Vishay-Dale, PartNumber=CRCW060310M0JNEA, Power_W=100mW, Supplier Part Number 1=541-10MGCT-ND, TempCo="200 ppm/C", Tolerance_%=5%, Value2=0.1W, Value_Code=10M0, ValueDisplayed=10M, AEC Category=Q200, AEC Grade=0, AEC Qualified=Y, ComponentLink1Description="Datasheet link", ComponentLink1URL=http://www.vishay.com/docs/20035/dcrcwe3.pdf, CompType=Resistor, EIA_Code=E24, LatestRevisionDate=2017-06-13, MountType=SMT, PackageReference=0603, Published=2008-06-26, Publisher="Texas Instruments", Res_ohm=10M, RoHS=E, SizeArea_mm2=1.28, SizeX_mm=1.6, SizeY_mm=0.8, SizeZ_mm=1, Supplier 1=Digi-Key, Supplier 2=Newark, Supplier 3=Mouser, Supplier Part Number 2=59M6761, Supplier Part Number 3=71-CRCW0603J-10M-E3, SymbolVersion=2009-05-29, Technology="Thick Film", U/M=EA, Value1=5%, VDC_V=75V
R38 R58 R79: library part CMP-0025753-4, "RES, 20 k, 5%, 0.1 W, AEC-Q200 Grade 0, 0603", Manufacturer=Vishay-Dale, Power_W=100mW, Supplier Part Number 1=541-20KGCT-ND, TempCo="200 ppm/C", Tolerance_%=5%, Value2=0.1W, Value_Code=20k0, ValueDisplayed=20k, AEC Category=Q200, AEC Grade=0, AEC Qualified=Y, ComponentLink1Description="Datasheet link", ComponentLink1URL=http://www.vishay.com/docs/20035/dcrcwe3.pdf, CompType=Resistor, EIA_Code=E24, MountType=SMT, PackageReference=0603, PartNumber=CRCW060320K0JNEA, Res_ohm=20k, RoHS=E, SizeArea_mm2=1.28, SizeX_mm=1.6, SizeY_mm=0.8, SizeZ_mm=1, Supplier 1=Digi-Key, Supplier 2=Newark, Supplier 3=Mouser, Supplier Part Number 2=59M6783, Supplier Part Number 3=71-CRCW0603J-20K-E3, Technology="Thick Film", Value1=5%, VDC_V=75V
R44: library part CMP-0023326-5, "RES, 95.3 k, 1%, 0.1 W, 0603", Manufacturer=Yageo, Power_W=100mW, Supplier Part Number 1=311-95.3KHRCT-ND, TempCo="100 ppm/C", Tolerance_%=1%, Value2=0.1W, Value_Code=95k3, ValueDisplayed=95.3k, AEC Category=Q200, AEC Grade=N/A, AEC Qualified=N, ComponentLink1Description="Datasheet link", ComponentLink1URL=http://www.yageo.com/pdf/Pu-RC0603_51_PbFree_L_2.pdf, CompType=Resistor, EIA_Code=E96, MountType=SMT, PackageReference=0603, PartNumber=RC0603FR-0795K3L, Res_ohm=95.3k, RoHS=Y, SizeArea_mm2=1.28, SizeAreaWB_mm2=4.68, SizeX_mm=1.6, SizeY_mm=0.8, SizeZ_mm=1, Supplier 1=Digi-Key, Supplier 2=Mouser, Supplier Part Number 2=603-RC0603FR-0795K3L, Technology="Thick Film", Value1=1%, VDC_V=75V
R45 R48: library part CMP-0018728-3, "RES, 7.5 k, 5%, 0.25 W, AEC-Q200 Grade 0, 1206", Manufacturer=Vishay-Dale, Power_W=250mW, Supplier Part Number 1=541-7.5KECT-ND, TempCo="200 ppm/C", Tolerance_%=5%, Value2=0.25W, Value_Code=7k50, ValueDisplayed=7.5k, AEC Category=Q200, AEC Grade=0, AEC Qualified=Y, ComponentLink1Description="Datasheet link", ComponentLink1URL=http://www.vishay.com/docs/20035/dcrcwe3.pdf, CompType=Resistor, EIA_Code=E24, MountType=SMT, PackageReference=1206, PartNumber=CRCW12067K50JNEA, Res_ohm=7.5k, RoHS=E, SizeArea_mm2=5.12, SizeX_mm=3.2, SizeY_mm=1.6, SizeZ_mm=1.35, Supplier 1=Digi-Key, Supplier 2=Newark, Supplier 3=Mouser, Supplier Part Number 2=89M6889, Supplier Part Number 3=71-CRCW1206J-7.5K-E3, Technology="Thick Film", Value1=5%, VDC_V=200V
R46: library part CMP-0015368-2, "RES, 0, 5%, 2 W, 2512 WIDE", Manufacturer="Vishay Draloric", PartNumber=RCL12250000Z0EG, Power_W=2W, Supplier Part Number 1=RCL0.0ECT-ND, TempCo=ppm/C, Tolerance_%=5%, Value_Code=0000, ValueDisplayed=0, AEC Category=Q200, AEC Qualified=?, ComponentLink1Description="Datasheet link", ComponentLink1URL=http://www.vishay.com/docs/20046/rcle3.pdf, CompType=Resistor, EIA_Code=E24, Green_EU RoHS="Passed with Exemption", Green_EU RoHS-2=Incomplete, Green_Lifecycle=Active, Green_REACh=Passed, LatestRevisionDate=2017-03-09, MountType=SMT, PackageReference="2512 WIDE", Published=2008-06-26, Publisher="Texas Instruments", Res_ohm=0, RoHS=Y, Supplier 1=Digi-Key, Supplier 2=Mouser, Supplier Part Number 2=71-RCL12250000Z0EG, SymbolVersion=2009-05-29, Technology="Thick Film", U/M=EA, Value1=5%, Value2=2W
R55: library part CMP-0025825-4, "RES, 51, 5%, 0.1 W, AEC-Q200 Grade 0, 0603", Manufacturer=Vishay-Dale, Power_W=100mW, Supplier Part Number 1=541-51GCT-ND, TempCo="200 ppm/C", Tolerance_%=5%, Value2=0.1W, Value_Code=51R0, ValueDisplayed=51, AEC Category=Q200, AEC Grade=0, AEC Qualified=Y, ComponentLink1Description="Datasheet link", ComponentLink1URL=http://www.vishay.com/docs/20035/dcrcwe3.pdf, CompType=Resistor, EIA_Code=E24, MountType=SMT, PackageReference=0603, PartNumber=CRCW060351R0JNEA, Res_ohm=51, RoHS=E, SizeArea_mm2=1.28, SizeX_mm=1.6, SizeY_mm=0.8, SizeZ_mm=1, Supplier 1=Digi-Key, Supplier 2=Newark, Supplier 3=Mouser, Supplier Part Number 2=59M6822, Supplier Part Number 3=71-CRCW0603J-51-E3, Technology="Thick Film", Value1=5%, VDC_V=75V
R57: library part CMP-0025701-4, "RES, 10 k, 5%, 0.1 W, AEC-Q200 Grade 0, 0603", Manufacturer=Vishay-Dale, PartNumber=CRCW060310K0JNEA, Power_W=100mW, Supplier Part Number 1=541-10KGCT-ND, TempCo="200 ppm/C", Tolerance_%=5%, Value2=0.1W, Value_Code=10k0, ValueDisplayed=10k, AEC Category=Q200, AEC Grade=0, AEC Qualified=Y, ComponentLink1Description="Datasheet link", ComponentLink1URL=http://www.vishay.com/docs/20035/dcrcwe3.pdf, CompType=Resistor, EIA_Code=E24, LatestRevisionDate=2017-06-13, MountType=SMT, PackageReference=0603, Published=2008-06-26, Publisher="Texas Instruments", Res_ohm=10k, RoHS=E, SizeArea_mm2=1.28, SizeX_mm=1.6, SizeY_mm=0.8, SizeZ_mm=1, Supplier 1=Digi-Key, Supplier 2=Newark, Supplier 3=Mouser, Supplier Part Number 2=52K8066, Supplier Part Number 3=71-CRCW0603J-10K-E3, SymbolVersion=2009-05-29, Technology="Thick Film", U/M=EA, Value1=5%, VDC_V=75V
R59 R82: library part CMP-0025830-4, "RES, 5.1 k, 5%, 0.1 W, AEC-Q200 Grade 0, 0603", Manufacturer=Vishay-Dale, PartNumber=CRCW06035K10JNEA, Power_W=100mW, Supplier Part Number 1=541-5.1KGCT-ND, TempCo="200 ppm/C", Tolerance_%=5%, Value2=0.1W, Value_Code=5k10, ValueDisplayed=5.1k, AEC Category=Q200, AEC Grade=0, AEC Qualified=Y, ComponentLink1Description="Datasheet link", ComponentLink1URL=http://www.vishay.com/docs/20035/dcrcwe3.pdf, CompType=Resistor, EIA_Code=E24, LatestRevisionDate=2017-06-13, MountType=SMT, PackageReference=0603, Published=2008-06-26, Publisher="Texas Instruments", Res_ohm=5.1k, RoHS=E, SizeArea_mm2=1.28, SizeX_mm=1.6, SizeY_mm=0.8, SizeZ_mm=1, Supplier 1=Digi-Key, Supplier 2=Newark, Supplier 3=Farnell, Supplier Part Number 2=89M6773, Supplier Part Number 3=1570751, SymbolVersion=2009-05-29, Technology="Thick Film", U/M=EA, Value1=5%, VDC_V=75V
R60: library part CMP-0025935-5, "RES, 62 k, 5%, 0.1 W, 0603", Manufacturer=Yageo, Power_W=100mW, Supplier Part Number 1=311-62KGRCT-ND, TempCo="100 ppm/C", Tolerance_%=5%, Value2=0.1W, Value_Code=62k0, ValueDisplayed=62k, AEC Category=Q200, AEC Grade=N/A, AEC Qualified=N, ComponentLink1Description="Datasheet link", ComponentLink1URL=http://www.yageo.com/pdf/Pu-RC0603_51_PbFree_L_2.pdf, CompType=Resistor, EIA_Code=E24, MountType=SMT, PackageReference=0603, PartNumber=RC0603JR-0762KL, Res_ohm=62k, RoHS=Y, SizeArea_mm2=1.28, SizeAreaWB_mm2=4.68, SizeX_mm=1.6, SizeY_mm=0.8, SizeZ_mm=1, Supplier 1=Digi-Key, Supplier 2=Mouser, Supplier 3=Farnell, Supplier Part Number 2=603-RC0603JR-0762KL, Supplier Part Number 3=1799444, Technology="Thick Film", Value1=5%, VDC_V=75V